# EAGLE board SDMAC (EAGLE 9.6.2)
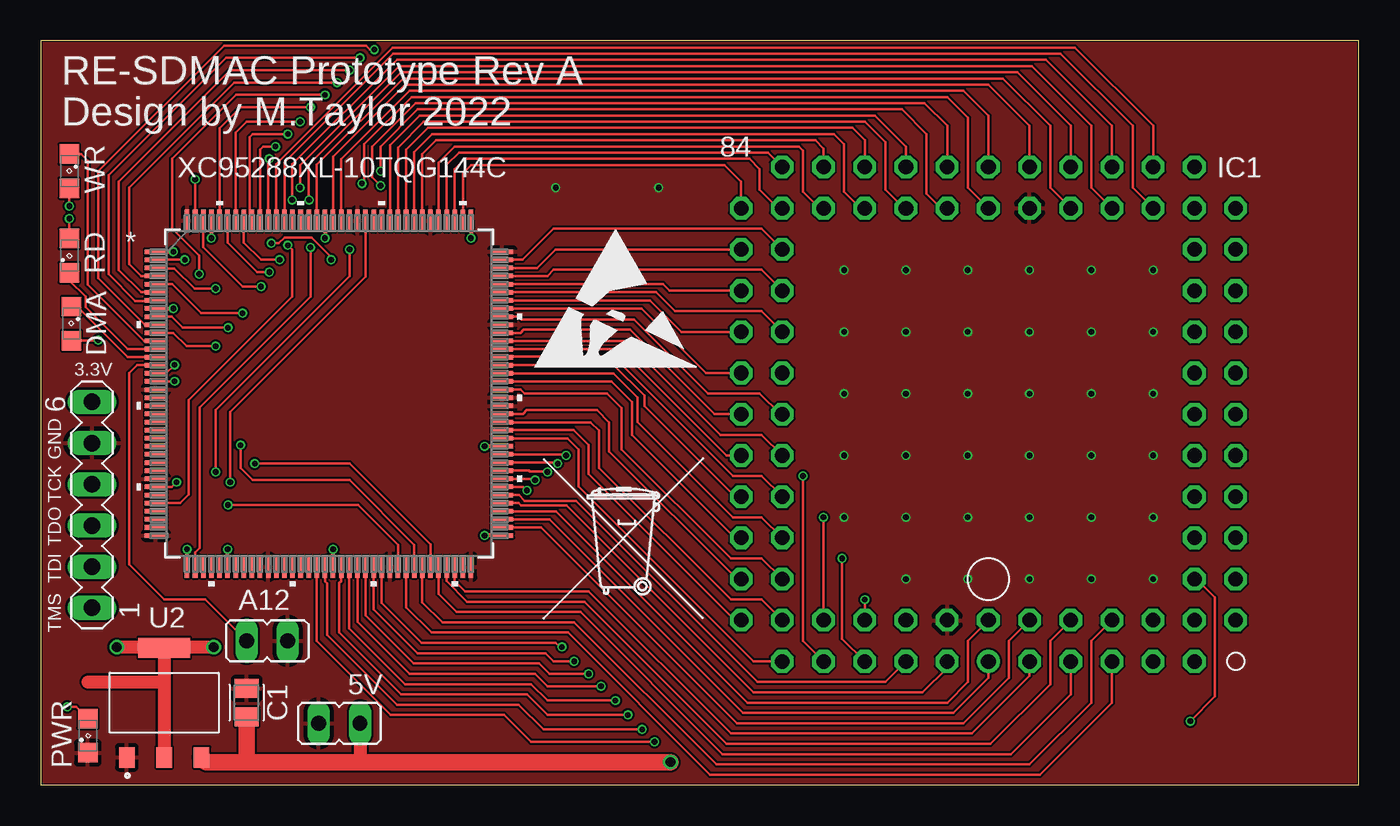
[diagram p0: board, top side]
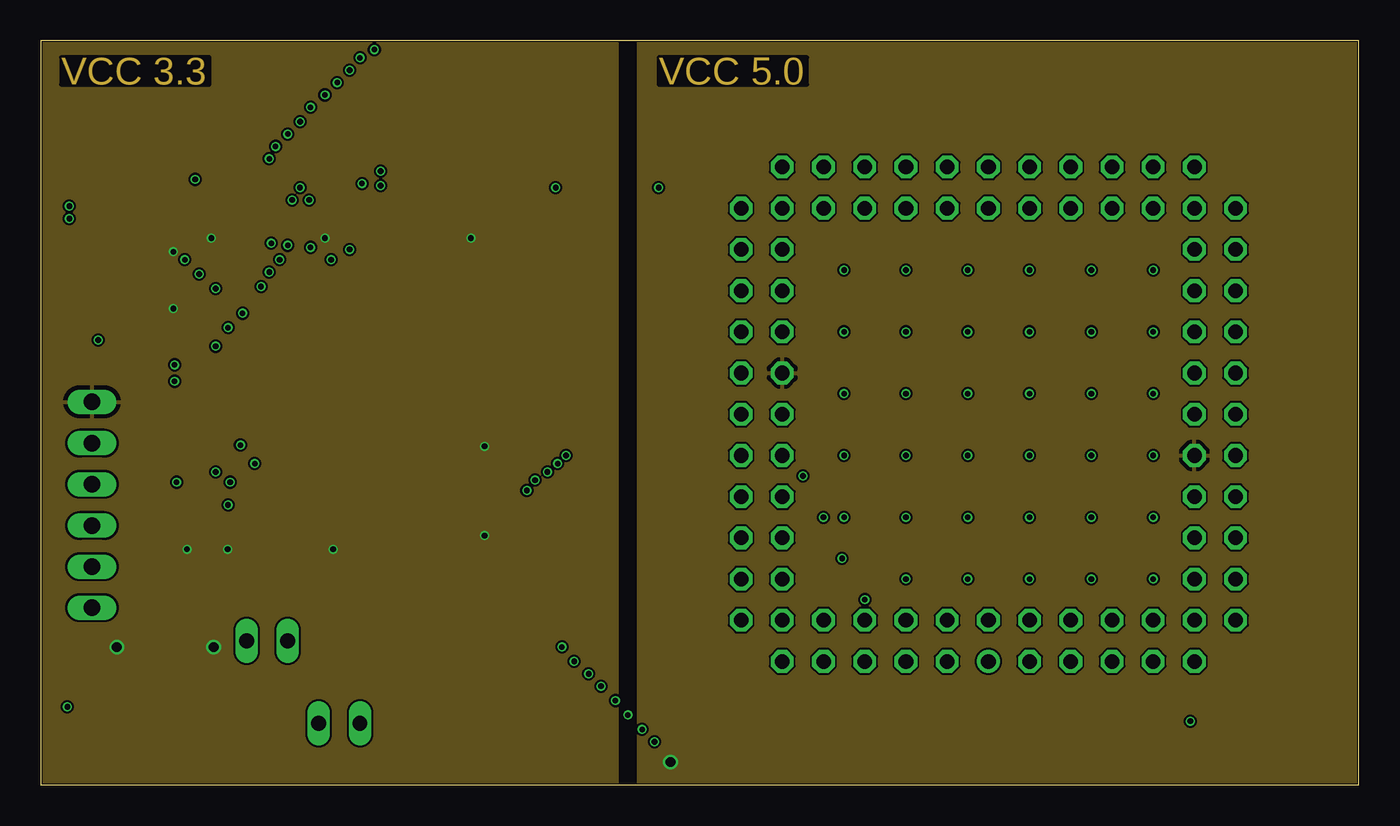
[diagram p1: board, inner layer VCC]
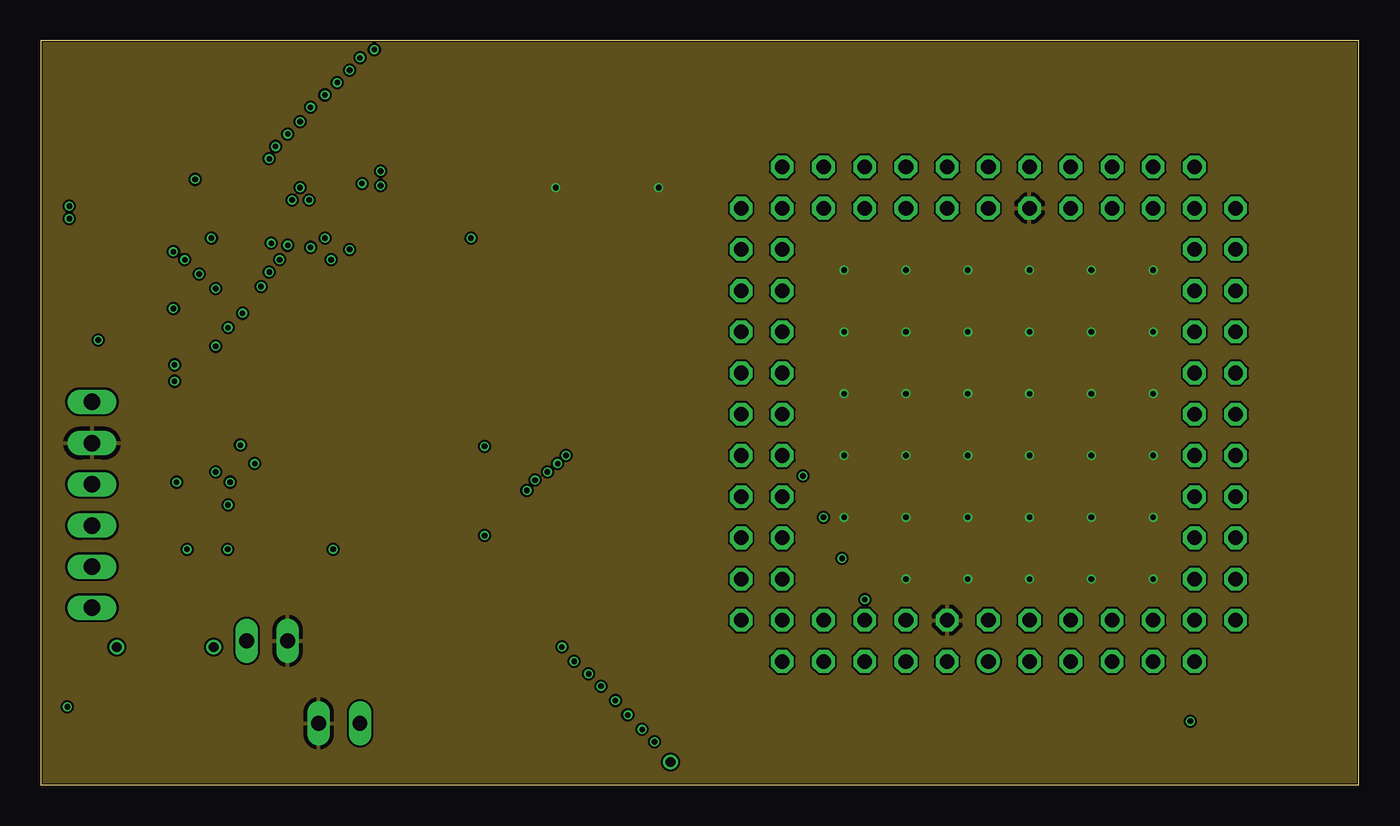
[diagram p2: board, inner layer GND]
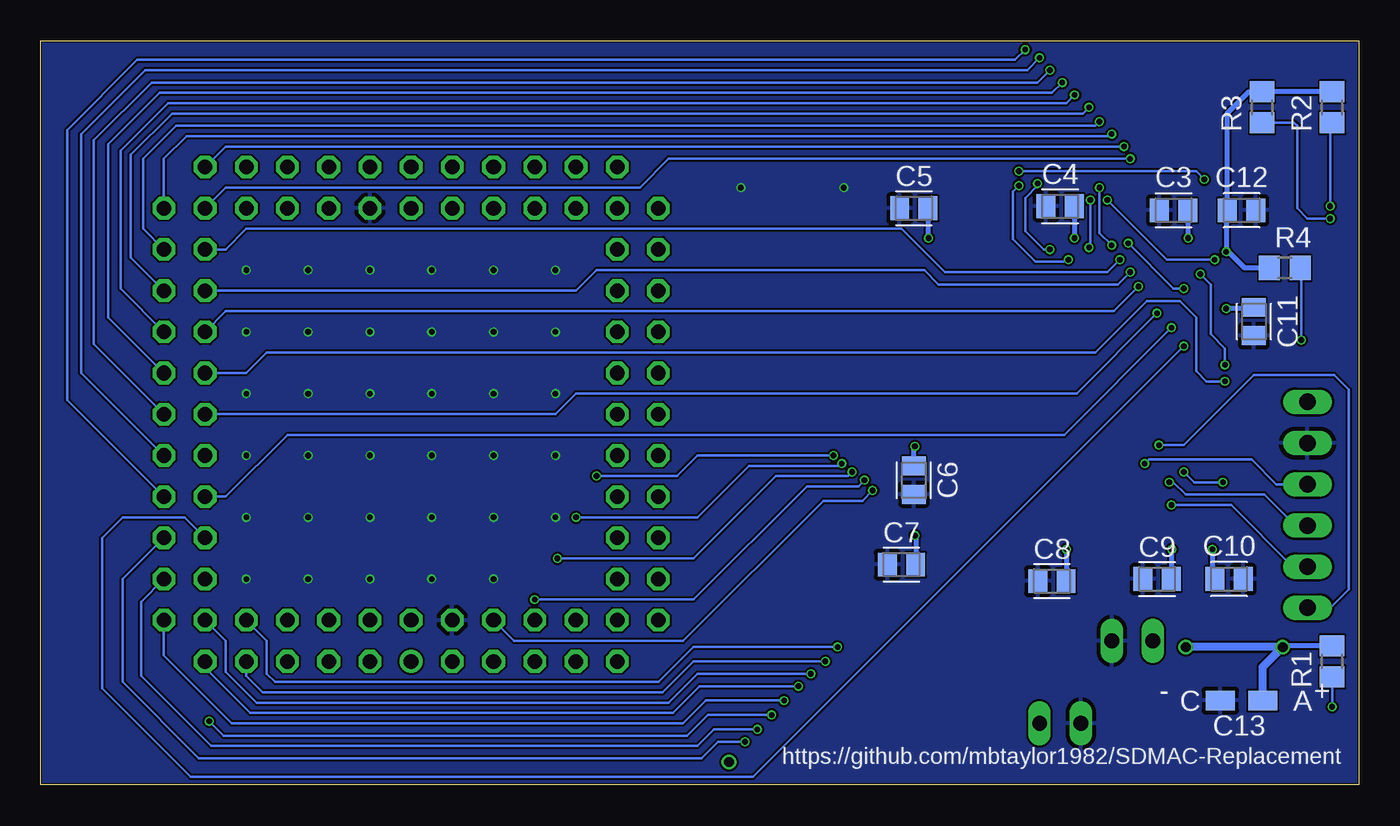
[diagram p3: board, bottom side, seen from below]

Size 81.26 x 45.9 mm. Coordinates in mm from the lower left corner, seen from the top.
Outline: 0,0 81.26,0 81.26,45.9 0,45.9 0,0
Copper layers (1*2*15*16): Top 0.035559375mm / dielectric 0.17018125mm / VCC 0.01778125mm / dielectric 47mil / GND 0.01778125mm / dielectric 0.17018125mm / Bottom 0.035559375mm
Design rules "jlcpcb-4-layer": minimum track width 5mil, minimum drill 0.2mm, track to track 0.126490625mm, track to pad 0.126490625mm, pad to pad 0.126490625mm, via to via 0.126490625mm, smd to smd 0mil, copper to edge 0.1mm, drill to drill 5mil, minimum pad ring 4mil, minimum via ring 4mil, stop-mask expansion 3mil, vias tented up to drill 100mil, thermal gap 10mil

## Footprints (pad centres in the part's own frame; a part is rotated, then mirrored left to right if it is on the bottom)
JP1 = drill 0.914 long: 1 0,-1.27; 2 0,1.27
CAPC2012X110 = smd 1.165 x 1.465: 1 -0.875,0; 2 0.875,0
A = smd 1.8 x 1.23: A 1.31,0; C -1.31,0
SML0805 = smd 1.2 x 1.2: A 1.05,0; C -1.05,0
PLCC84_T = drill 0.9 pad 1.4: 1 0,15.24 | drill 0.9 pad 1.4 octagon: 2 0,12.7; 3 -2.54,15.24; 4 -2.54,12.7; 5 -5.08,15.24; 6 -5.08,12.7; 7 -7.62,15.24; 8 -7.62,12.7; 9 -10.16,15.24; 10 -10.16,12.7; 11 -12.7,15.24; 12 -15.24,12.7; 13 -12.7,12.7; 14 -15.24,10.16; 15 -12.7,10.16; 16 -15.24,7.62; 17 -12.7,7.62; 18 -15.24,5.08; 19 -12.7,5.08; 20 -15.24,2.54; 21 -12.7,2.54; 22 -15.24,0; 23 -12.7,0; 24 -15.24,-2.54; 25 -12.7,-2.54; 26 -15.24,-5.08; 27 -12.7,-5.08; 28 -15.24,-7.62; 29 -12.7,-7.62; 30 -15.24,-10.16; 31 -12.7,-10.16; 32 -15.24,-12.7; 33 -12.7,-15.24; 34 -12.7,-12.7; 35 -10.16,-15.24; 36 -10.16,-12.7; 37 -7.62,-15.24; 38 -7.62,-12.7; 39 -5.08,-15.24; 40 -5.08,-12.7; 41 -2.54,-15.24; 42 -2.54,-12.7; 43 0,-15.24; 44 0,-12.7; 45 2.54,-15.24; 46 2.54,-12.7; 47 5.08,-15.24; 48 5.08,-12.7; 49 7.62,-15.24; 50 7.62,-12.7; 51 10.16,-15.24; 52 10.16,-12.7; 53 12.7,-15.24; 54 15.24,-12.7; 55 12.7,-12.7; 56 15.24,-10.16; 57 12.7,-10.16; 58 15.24,-7.62; 59 12.7,-7.62; 60 15.24,-5.08; 61 12.7,-5.08; 62 15.24,-2.54; 63 12.7,-2.54; 64 15.24,0; 65 12.7,0; 66 15.24,2.54; 67 12.7,2.54; 68 15.24,5.08; 69 12.7,5.08; 70 15.24,7.62; 71 12.7,7.62; 72 15.24,10.16; 73 12.7,10.16; 74 15.24,12.7; 75 12.7,15.24; 76 12.7,12.7; 77 10.16,15.24; 78 10.16,12.7; 79 7.62,15.24; 80 7.62,12.7; 81 5.08,15.24; 82 5.08,12.7; 83 2.54,15.24; 84 2.54,12.7
R0805 = smd 1.3 x 1.5: 1 -0.95,0; 2 0.95,0
MA06-1 = drill 1.016 long: 1 -6.35,0; 2 -3.81,0; 3 -1.27,0; 4 1.27,0; 5 3.81,0; 6 6.35,0
144-TQFP_XIL = smd 1.359 x 0.279: 1 -10.674,8.75; 2 -10.674,8.25; 3 -10.674,7.75; 4 -10.674,7.25; 5 -10.674,6.75; 6 -10.674,6.25; 7 -10.674,5.75; 8 -10.674,5.25; 9 -10.674,4.75; 10 -10.674,4.25; 11 -10.674,3.75; 12 -10.674,3.25; 13 -10.674,2.75; 14 -10.674,2.25; 15 -10.674,1.75; 16 -10.674,1.25; 17 -10.674,0.75; 18 -10.674,0.25; 19 -10.674,-0.25; 20 -10.674,-0.75; 21 -10.674,-1.25; 22 -10.674,-1.75; 23 -10.674,-2.25; 24 -10.674,-2.75; 25 -10.674,-3.25; 26 -10.674,-3.75; 27 -10.674,-4.25; 28 -10.674,-4.75; 29 -10.674,-5.25; 30 -10.674,-5.75; 31 -10.674,-6.25; 32 -10.674,-6.75; 33 -10.674,-7.25; 34 -10.674,-7.75; 35 -10.674,-8.25; 36 -10.674,-8.75; 73 10.674,-8.75; 74 10.674,-8.25; 75 10.674,-7.75; 76 10.674,-7.25; 77 10.674,-6.75; 78 10.674,-6.25; 79 10.674,-5.75; 80 10.674,-5.25; 81 10.674,-4.75; 82 10.674,-4.25; 83 10.674,-3.75; 84 10.674,-3.25; 85 10.674,-2.75; 86 10.674,-2.25; 87 10.674,-1.75; 88 10.674,-1.25; 89 10.674,-0.75; 90 10.674,-0.25; 91 10.674,0.25; 92 10.674,0.75; 93 10.674,1.25; 94 10.674,1.75; 95 10.674,2.25; 96 10.674,2.75; 97 10.674,3.25; 98 10.674,3.75; 99 10.674,4.25; 100 10.674,4.75; 101 10.674,5.25; 102 10.674,5.75; 103 10.674,6.25; 104 10.674,6.75; 105 10.674,7.25; 106 10.674,7.75; 107 10.674,8.25; 108 10.674,8.75 | smd 0.279 x 1.359: 37 -8.75,-10.674; 38 -8.25,-10.674; 39 -7.75,-10.674; 40 -7.25,-10.674; 41 -6.75,-10.674; 42 -6.25,-10.674; 43 -5.75,-10.674; 44 -5.25,-10.674; 45 -4.75,-10.674; 46 -4.25,-10.674; 47 -3.75,-10.674; 48 -3.25,-10.674; 49 -2.75,-10.674; 50 -2.25,-10.674; 51 -1.75,-10.674; 52 -1.25,-10.674; 53 -0.75,-10.674; 54 -0.25,-10.674; 55 0.25,-10.674; 56 0.75,-10.674; 57 1.25,-10.674; 58 1.75,-10.674; 59 2.25,-10.674; 60 2.75,-10.674; 61 3.25,-10.674; 62 3.75,-10.674; 63 4.25,-10.674; 64 4.75,-10.674; 65 5.25,-10.674; 66 5.75,-10.674; 67 6.25,-10.674; 68 6.75,-10.674; 69 7.25,-10.674; 70 7.75,-10.674; 71 8.25,-10.674; 72 8.75,-10.674; 109 8.75,10.674; 110 8.25,10.674; 111 7.75,10.674; 112 7.25,10.674; 113 6.75,10.674; 114 6.25,10.674; 115 5.75,10.674; 116 5.25,10.674; 117 4.75,10.674; 118 4.25,10.674; 119 3.75,10.674; 120 3.25,10.674; 121 2.75,10.674; 122 2.25,10.674; 123 1.75,10.674; 124 1.25,10.674; 125 0.75,10.674; 126 0.25,10.674; 127 -0.25,10.674; 128 -0.75,10.674; 129 -1.25,10.674; 130 -1.75,10.674; 131 -2.25,10.674; 132 -2.75,10.674; 133 -3.25,10.674; 134 -3.75,10.674; 135 -4.25,10.674; 136 -4.75,10.674; 137 -5.25,10.674; 138 -5.75,10.674; 139 -6.25,10.674; 140 -6.75,10.674; 141 -7.25,10.674; 142 -7.75,10.674; 143 -8.25,10.674; 144 -8.75,10.674
SOT-223 = smd 1.26 x 0.96: 1 -3.375,2.3; 2 -3.375,0; 3 -3.375,-2.3 | smd 1.26 x 3.19: 4 3.375,0

## Placement (x,y rotation side)
5V  [JP1]  18.42,3.81 270 top
A12  [JP1]  13.97,8.89 90 top
C1  10uF  [CAPC2012X110]  12.7,5.08 90 top
C3  0.1uF  [CAPC2012X110]  11.43,35.43 180 bottom
C4  0.1uF  [CAPC2012X110]  18.42,35.69 180 bottom
C5  0.1uF  [CAPC2012X110]  27.43,35.56 180 bottom
C6  0.1uF  [CAPC2012X110]  27.43,18.8 270 bottom
C7  0.1uF  [CAPC2012X110]  28.19,13.59 180 bottom
C8  0.1uF  [CAPC2012X110]  18.92,12.57 180 bottom
C9  0.1uF  [CAPC2012X110]  12.45,12.7 180 bottom
C10  0.1uF  [CAPC2012X110]  8,12.7 0 bottom
C11  0.1uF  [CAPC2012X110]  6.48,28.57 270 bottom
C12  0.1uF  [CAPC2012X110]  7.24,35.43 0 bottom
C13  10uF  [A]  7.24,5.21 0 bottom
DMA  [SML0805]  1.9,28.45 270 top
IC1  SUPER_DMAC_THT  [PLCC84_T]  58.42,22.86 180 top
PWR  [SML0805]  2.92,3.05 90 top
R1  430  [R0805]  1.65,7.62 270 bottom
R2  430  [R0805]  1.65,41.78 270 bottom
R3  430  [R0805]  5.97,41.78 270 bottom
R4  430  [R0805]  4.57,31.88 0 bottom
RD  [SML0805]  1.78,32.64 90 top
SV1  [MA06-1]  3.18,17.27 90 top
U1  XC95288XL-10TQG144C  [144-TQFP_XIL]  17.78,24.13 0 top
U2  NCP1117ST33T3G  [SOT-223]  7.62,5.08 90 top
U$1  [ESD_10.00]  30.35,25.65 0 top
U$2  [TONNE_10.00]  35.81,13.21 0 top
WR  [SML0805]  1.78,37.85 270 top

## Library data of the parts
5V A12 = jumper
C1 C3-C12 = Capacitor; CATEGORY: Capacitor
C13 = Volks73-Kemet; CAPACITANCE: 10µF; CATEGORY: Capacitors; DESCRIPTION: CAP TANT 10UF 10V 10% 1206; DOCUMENTATION_LINK: <a href="http://www.kemet.com/Lists/ProductCatalog/Attachments/254/KEM_T2005_T491.pdf">Datasheet</a>; DOCUMENTATION_URL: http://www.kemet.com/Lists/ProductCatalog/Attachments/254/KEM_T2005_T491.pdf; ESR: 3.8 Ohm; FAMILY: Tantalum Capacitors; FEATURES: General Purpose; HEIGHT: 0.071" (1.80mm); LEAD_SPACING: -; LIFETIME_AT_TEMP: 2000 Hrs @ 85°C; MANUFACTURER: Kemet; MANUFACTURER_SIZE_CODE: A; MOUNTING_TYPE: Surface Mount; OPERATING_TEMPERATURE: -55°C ~ 125°C; PACKAGE: 1206 (3216 Metric); PART_NUMBER: T491A106K010AT; SERIES: T491; SIZE: 0.126" L x 0.063" W (3.20mm x 1.60mm); SUPPLIER_ITEM_LINK: <a href="http://www.digikey.com/product-detail/en/T491A106K010AT/399-3684-1-ND/819009">Details</a>; SUPPLIER_ITEM_NUMBER: 399-3684-1-ND; SUPPLIER_ITEM_URL: http://www.digikey.com/product-detail/en/T491A106K010AT/399-3684-1-ND/819009; SUPPLIER_LINK: <a href="http://www.digikey.com">Home Page</a>; SUPPLIER_NAME: Digi-Key; SUPPLIER_URL: http://www.digikey.com; TOLERANCE: ±10%; TYPE: Molded; VOLTAGE-RATED: 10V
DMA PWR RD WR = led
IC1 = Amiga
R1-R4 = rcl; SPICEPREFIX: R
SV1 = con-lstb; OC_FARNELL: unknown; OC_NEWARK: unknown; SPICEPREFIX: X
U1 = XilinxXC95288; COPYRIGHT: Copyright (C) 2022 Ultra Librarian. All rights reserved.; MANUFACTURER_PART_NUMBER: XC95288XL-10TQG144C; MFR_NAME: Xilinx Inc
U2 = IC; CREATED_BY: PCBLayout.com; DIGIKEY_PART_NUMBER: NCP1117ST33T3GOSTR-ND; MANUFACTURER: ON Semiconductor; MPN: NCP1117ST33T3G; PACKAGE: SOT-223
U$1 U$2 = logo

## Nets
!AS: IC1.38 U1.32
!BERR: IC1.47 U1.119
!BG: IC1.82 U1.79
!BGACK: IC1.83 U1.77
!BR: IC1.81 U1.78
!CS: IC1.45 U1.3
!CSS: IC1.67 U1.97
!CSX0: IC1.70 U1.92
!CSX1: IC1.71 U1.93
!DACK: IC1.66 U1.96
!DMAEN: IC1.75 U1.85
!DREQ: IC1.65 U1.100
!DS: IC1.39 U1.38
!DSACK0: IC1.41 U1.126
!DSACK1: IC1.40 U1.128
!INT2: IC1.35 U1.133
!IOR: IC1.69 U1.95
!IORDY: IC1.72 U1.88
!IOW: IC1.68 U1.94
!RST: IC1.46 U1.143
!STERM: IC1.43 U1.125
A12: A12.2 U1.15
CLK: IC1.44 U1.30
CPU_ADDR2: IC1.76 U1.87
CPU_ADDR3: IC1.77 U1.83
CPU_ADDR4: IC1.78 U1.82
CPU_ADDR5: IC1.79 U1.81
CPU_ADDR6: IC1.80 U1.80
CPU_DATAD0: IC1.1 U1.75
CPU_DATAD1: IC1.2 U1.76
CPU_DATAD2: IC1.3 U1.70
CPU_DATAD3: IC1.4 U1.74
CPU_DATAD4: IC1.5 U1.68
CPU_DATAD5: IC1.6 U1.69
CPU_DATAD6: IC1.7 U1.64
CPU_DATAD7: IC1.8 U1.66
CPU_DATAD8: IC1.9 U1.60
CPU_DATAD9: IC1.10 U1.61
CPU_DATAD10: IC1.11 U1.58
CPU_DATAD11: IC1.12 U1.57
CPU_DATAD12: IC1.13 U1.59
CPU_DATAD13: IC1.14 U1.54
CPU_DATAD14: IC1.15 U1.56
CPU_DATAD15: IC1.16 U1.53
CPU_DATAD16: IC1.17 U1.11
CPU_DATAD17: IC1.18 U1.10
CPU_DATAD18: IC1.19 U1.9
CPU_DATAD19: IC1.20 U1.7
CPU_DATAD20: IC1.22 U1.6
CPU_DATAD21: IC1.23 U1.5
CPU_DATAD22: IC1.24 U1.4
CPU_DATAD23: IC1.25 U1.17
CPU_DATAD24: IC1.26 U1.16
CPU_DATAD25: IC1.27 U1.142
CPU_DATAD26: IC1.28 U1.140
CPU_DATAD27: IC1.29 U1.139
CPU_DATAD28: IC1.30 U1.138
CPU_DATAD29: IC1.31 U1.137
CPU_DATAD30: IC1.32 U1.136
CPU_DATAD31: IC1.33 U1.135
DMA_LED: DMA.C U1.14
GND: 5V.1 A12.1 C1.2 C3.2 C4.2 C5.2 C6.2 C7.2 C8.2 C9.2 C10.2 C11.2 C12.2 C13.C IC1.42 IC1.84 PWR.C SV1.5 U1.18 U1.29 U1.36 U1.47 U1.62 U1.72 U1.89 U1.90 U1.99 U1.108 U1.114 U1.123 U1.144 U2.1
INC_ADD: IC1.74 U1.86
INTA: IC1.73 U1.91
INTB: IC1.34 U1.134
N$1: PWR.A R1.2
N$2: R2.2 WR.A
N$3: R3.2 RD.A
N$4: DMA.A R4.2
P_DATA0: IC1.48 U1.118
P_DATA1: IC1.49 U1.117
P_DATA2: IC1.50 U1.116
P_DATA3: IC1.51 U1.115
P_DATA4: IC1.52 U1.113
P_DATA5: IC1.53 U1.112
P_DATA6: IC1.54 U1.110
P_DATA7: IC1.55 U1.111
P_DATA8: IC1.56 U1.106
P_DATA9: IC1.57 U1.107
P_DATA10: IC1.58 U1.104
P_DATA11: IC1.59 U1.105
P_DATA12: IC1.60 U1.102
P_DATA13: IC1.61 U1.103
P_DATA14: IC1.62 U1.101
P_DATA15: IC1.64 U1.98
R!W: IC1.37 U1.2
RD_LED: RD.C U1.13
SIZ1: IC1.36 U1.132
TCK: SV1.4 U1.67
TDI: SV1.2 U1.63
TDO: SV1.3 U1.122
TMS: SV1.1 U1.65
VCC3.3: C3.1 C4.1 C5.1 C6.1 C7.1 C8.1 C9.1 C10.1 C11.1 C12.1 C13.A R1.1 R2.1 R3.1 R4.1 SV1.6 U1.1 U1.8 U1.37 U1.42 U1.55 U1.73 U1.84 U1.109 U1.127 U1.141 U2.2 U2.4
VCC5: 5V.2 C1.1 IC1.21 IC1.63 U2.3
WR_LED: U1.12 WR.C

## Tracks (layer width: path | path; a pad name or v marks a point on that pad's centre or on a via)
!AS  (via drill 0.35)
  Top 0.152: IC1.38 64.77,36.83 64.77,40.64 61.09,44.32 22.08,44.32 15.99,38.23 v15.99,36.83 | v15.24,33.27 15.49,33.02 15.49,30.1 9.14,23.75 9.14,17.91 8.62,17.38 U1.32
  Bottom 0.152: v15.99,36.83 15.99,34.02 v15.24,33.27
!BERR
  Top 0.152: U1.119 21.53,39.44 23.37,41.28 51.44,41.28 53.34,39.37 IC1.47
!BG  (via drill 0.35)
  Top 0.152: U1.79 29.75,18.38 v29.97,18.16
  Bottom 0.152: IC1.82 52.07,8.89 41.66,8.89 33.02,17.53 30.61,17.53 v29.97,18.16
!BGACK
  Top 0.152: IC1.83 55.88,7.24 54.36,5.71 43.94,5.71 32.41,17.25 29.62,17.25 29.46,17.4 28.47,17.4 U1.77
!BR
  Top 0.152: IC1.81 52.07,6.35 44.2,6.35 33.02,17.53 29.85,17.53 29.49,17.88 U1.78
!CS  (via drill 0.35)
  Top 0.152: IC1.45 55.88,40.64 54.48,42.04 23.11,42.04 20.45,39.37 20.45,37.47 v20.96,36.96 | U1.3 7.14,31.85 8.25,31.85 9.49,30.61 v10.79,30.61 | v17.91,32.39 17.91,32.56 16.71,33.75 15.04,33.75 14.69,33.4 v14.22,33.4
  Bottom 0.152: v10.79,30.61 11.43,30.61 v14.22,33.4 | v17.91,32.39 18.03,32.26 19.94,32.26 21.34,33.66 21.34,36.58 v20.96,36.96
!CSS
  Top 0.152: IC1.67 44.45,21.59 41.91,21.59 36.12,27.38 U1.97
!CSX0
  Top 0.152: IC1.70 42.8,15.24 36.45,21.59 36.45,23.62 35.18,24.89 28.47,24.89 U1.92
!CSX1
  Top 0.152: U1.93 35.33,25.38 36.8,23.9 36.8,22.38 42.67,16.51 44.45,16.51 IC1.71
!DACK
  Top 0.152: U1.96 35.73,26.88 42.29,20.32 IC1.66
!DMAEN
  Top 0.152: IC1.75 43.94,7.62 33.15,18.41 33.15,20.7 32.47,21.38 U1.85
!DREQ
  Top 0.152: IC1.65 45.59,22.86 44.32,24.13 41.15,24.13 36.58,28.7 29.65,28.7 29.47,28.88 U1.100
!DS  (via drill 0.35)
  Top 0.152: IC1.39 63.5,40.64 60.2,43.94 22.22,43.94 16.53,38.25 16.53,36.09 v16.55,36.07 | v16.64,33.15 16.64,30.11 9.81,23.28 9.81,14.62 9.53,14.35 U1.38
  Bottom 0.152: v16.55,36.07 16.55,33.23 v16.64,33.15
!DSACK0
  Top 0.152: IC1.41 60.96,40.64 58.42,43.18 22.48,43.18 18.03,38.73 U1.126
!DSACK1
  Top 0.152: IC1.40 62.23,36.83 62.23,40.64 59.31,43.56 22.35,43.56 17.03,38.24 U1.128
!INT2
  Top 0.152: IC1.35 68.58,40.64 63.75,45.47 21.7,45.47 14.53,38.29 U1.133
!IOR
  Top 0.152: IC1.69 44.45,19.05 42.67,19.05 35.31,26.42 28.49,26.42 U1.95
!IORDY
  Top 0.152: IC1.72 42.93,12.7 35.05,20.57 35.05,22.35 34.29,23.11 29.96,23.11 29.72,22.88 U1.88
!IOW
  Top 0.152: IC1.68 42.8,17.78 37.21,23.37 37.21,24 35.31,25.91 28.48,25.91 U1.94
!RST  (via drill 0.35)
  Top 0.152: IC1.46 55.5,35.56 54.61,36.45 54.61,40.13 53.09,41.66 23.24,41.66 20.96,39.37 v20.96,37.85 | v9.52,37.34 U1.143
  Bottom 0.152: v20.96,37.85 10.03,37.85 v9.52,37.34
!STERM
  Top 0.152: IC1.43 58.42,41.28 56.9,42.8 22.73,42.8 18.53,38.6 U1.125
A12
  Top 0.152: A12.2 10.16,11.43 7.62,11.43 5.46,13.59 5.46,25.4 5.97,25.91 7.08,25.91 U1.15
CLK  (via drill 0.35)
  Top 0.152: IC1.44 57.15,36.83 57.15,41.15 55.88,42.42 22.86,42.42 19.94,39.5 19.94,37.21 v19.81,37.08 | v19.05,33.02 19.05,31.38 10.79,23.13 v10.79,19.3 | v8.38,18.67 8.09,18.38 U1.30
  Bottom 0.152: v19.81,37.08 19.81,36.96 20.57,36.2 20.57,34.16 19.43,33.02 v19.05,33.02 | v10.79,19.3 10.16,18.67 v8.38,18.67
CPU_ADDR2
  Top 0.152: IC1.76 44.45,11.43 42.55,11.43 34.42,19.56 34.42,21.84 33.91,22.35 28.48,22.35 U1.87
CPU_ADDR3  (via drill 0.35)
  Top 0.152: U1.83 32.33,20.38 v32.39,20.32 | v46.99,19.05 46.99,8.89 IC1.77
  Bottom 0.152: v32.39,20.32 40.77,20.32 42.04,19.05 v46.99,19.05
CPU_ADDR4  (via drill 0.35)
  Top 0.152: U1.82 31.81,19.88 v31.88,19.81 | v48.26,16.51 IC1.78
  Bottom 0.152: v31.88,19.81 32,19.68 37.59,19.68 40.77,16.51 v48.26,16.51
CPU_ADDR5  (via drill 0.35)
  Top 0.152: U1.81 30.11,19.38 30.15,19.33 31.21,19.33 v31.24,19.3 | v49.4,13.97 49.4,9.02 IC1.79
  Bottom 0.152: v31.24,19.3 31.5,19.05 35.94,19.05 41.02,13.97 v49.4,13.97
CPU_ADDR6  (via drill 0.35)
  Top 0.152: U1.80 30.4,18.88 v30.48,18.8 | v50.8,11.43 IC1.80
  Bottom 0.152: v30.48,18.8 30.86,18.41 34.04,18.41 41.02,11.43 v50.8,11.43
CPU_DATAD0
  Top 0.152: IC1.1 58.42,6.6 56.26,4.45 43.31,4.45 31.37,16.38 U1.75
CPU_DATAD1
  Top 0.152: IC1.2 57.15,8.89 57.15,6.35 55.88,5.08 43.56,5.08 31.76,16.88 U1.76
CPU_DATAD2
  Top 0.152: IC1.3 60.96,6.73 57.4,3.18 42.55,3.18 33.78,11.94 26.16,11.94 25.53,12.57 U1.70
CPU_DATAD3
  Top 0.152: IC1.4 59.69,8.89 59.69,6.6 56.9,3.81 42.93,3.81 30.86,15.88 U1.74
CPU_DATAD4
  Top 0.152: IC1.5 63.5,5.59 59.82,1.91 42.04,1.91 33.27,10.67 25.65,10.67 24.53,11.79 U1.68
CPU_DATAD5
  Top 0.152: IC1.6 62.23,8.89 62.23,6.22 58.55,2.54 42.29,2.54 33.53,11.3 26.29,11.3 25.02,12.57 25.02,13.45 U1.69
CPU_DATAD6
  Top 0.152: IC1.7 66.04,5.08 61.59,0.64 41.28,0.64 32.51,9.4 24.09,9.4 22.53,10.96 U1.64
CPU_DATAD7
  Top 0.152: IC1.8 64.77,8.89 64.77,5.08 60.96,1.27 41.66,1.27 32.89,10.03 24.76,10.03 23.52,11.27 23.52,12.26 23.53,12.27 U1.66
CPU_DATAD8  (via drill 0.35)
  Top 0.152: U1.60 20.53,10.84 23.24,8.13 31.11,8.13 31.62,7.62 v32.89,7.62
  Bottom 0.152: IC1.9 68.58,6.73 67.56,5.71 42.93,5.71 41.02,7.62 v32.89,7.62
CPU_DATAD9  (via drill 0.35)
  Top 0.152: U1.61 21.03,11.23 23.5,8.76 31.75,8.76 32,8.51 v32.13,8.51
  Bottom 0.152: v32.13,8.51 41.02,8.51 43.18,6.35 66.8,6.35 67.31,6.86 67.31,8.89 IC1.10
CPU_DATAD10  (via drill 0.35)
  Top 0.152: U1.58 19.53,10.06 22.73,6.86 30.48,6.86 31.24,6.1 v34.54,6.1
  Bottom 0.152: v34.54,6.1 40.64,6.1 42.29,4.45 68.33,4.45 71.12,7.24 IC1.11
CPU_DATAD11  (via drill 0.35)
  Top 0.152: v35.43,5.21 31.24,5.21 30.23,6.22 22.48,6.22 19.03,9.67 U1.57
  Bottom 0.152: IC1.12 73.66,8 69.47,3.81 41.66,3.81 40.26,5.21 v35.43,5.21
CPU_DATAD12  (via drill 0.35)
  Top 0.152: U1.59 20.03,10.45 22.99,7.49 30.73,7.49 31.37,6.86 v33.78,6.86
  Bottom 0.152: v33.78,6.86 40.77,6.86 42.55,5.08 67.95,5.08 69.85,6.98 69.85,8.89 IC1.13
CPU_DATAD13  (via drill 0.35)
  Top 0.152: U1.54 17.53,12.57 17.66,12.44 17.66,10.04 17.65,10.03 17.65,9.27 21.97,4.95 29.46,4.95 30.99,3.43 v37.08,3.43
  Bottom 0.152: v37.08,3.43 39.75,3.43 40.77,2.41 70.74,2.41 75.06,6.73 75.06,11.3 IC1.14
CPU_DATAD14  (via drill 0.35)
  Top 0.152: IC1.15 71.25,12.7 72.39,11.56 72.39,5.46 v70.87,3.94 | v36.19,4.32 31.24,4.32 29.97,5.59 22.22,5.59 18.42,9.4 18.42,12.45 18.53,12.57 U1.56
  Bottom 0.152: v36.19,4.32 40.13,4.32 41.4,3.05 69.98,3.05 v70.87,3.94
CPU_DATAD15  (via drill 0.35)
  Top 0.152: v37.85,2.67 30.23,2.67 28.57,4.32 21.59,4.32 17.03,8.88 U1.53
  Bottom 0.152: IC1.16 76.2,12.7 76.2,6.35 71.5,1.65 40.51,1.65 39.5,2.67 v37.85,2.67
CPU_DATAD16  (via drill 0.35)
  Top 0.152: v10.79,27.05 9.02,27.05 8.19,27.88 U1.11
  Bottom 0.152: IC1.17 72.39,16.51 76.2,16.51 77.47,15.24 77.47,5.97 72.01,0.51 37.34,0.51 v10.79,27.05
CPU_DATAD17  (via drill 0.35)
  Top 0.152: v20.57,45.34 20.32,45.34 20.07,45.59 11.3,45.59 3.56,37.85 3.56,31.24 6.42,28.38 U1.10
  Bottom 0.152: IC1.18 79.63,23.75 79.63,40.39 75.31,44.7 21.21,44.7 v20.57,45.34
CPU_DATAD18  (via drill 0.35)
  Top 0.152: U1.9 8.08,28.88 8.76,28.19 v11.56,28.19
  Bottom 0.152: IC1.19 69.85,17.78 66.04,21.59 18.16,21.59 v11.56,28.19
CPU_DATAD19  (via drill 0.35)
  Top 0.152: U1.7 7.07,29.85 5.84,29.85 4.19,31.5 4.19,37.59 11.43,44.83 v19.68,44.83
  Bottom 0.152: IC1.20 78.74,25.4 78.74,40.13 74.8,44.07 20.45,44.07 v19.68,44.83
CPU_DATAD20  (via drill 0.35)
  Top 0.152: v19.05,44.07 11.68,44.07 4.83,37.21 4.83,31.75 6.2,30.38 U1.6
  Bottom 0.152: IC1.22 77.98,27.18 77.98,39.75 74.42,43.31 19.81,43.31 v19.05,44.07
CPU_DATAD21  (via drill 0.35)
  Top 0.152: U1.5 8.11,30.88 9.91,29.08 v12.45,29.08
  Bottom 0.152: IC1.23 49.53,22.86 48.26,24.13 17.4,24.13 v12.45,29.08
CPU_DATAD22  (via drill 0.35)
  Top 0.152: v18.29,43.31 11.94,43.31 5.46,36.83 5.46,32.13 6.21,31.38 U1.4
  Bottom 0.152: IC1.24 77.09,28.83 77.09,39.5 73.91,42.67 18.92,42.67 v18.29,43.31
CPU_DATAD23  (via drill 0.35)
  Top 0.152: U1.17 v8.24,24.88 v8.25,24.89
  Bottom 0.152: IC1.25 68.58,25.4 67.31,26.67 16.26,26.67 13.08,29.85 11.05,29.85 10.03,28.83 10.03,25.53 9.4,24.89 v8.25,24.89
CPU_DATAD24  (via drill 0.35)
  Top 0.152: v9.78,31.5 9.78,32.64 8.13,34.29 8.13,38.61 12.06,42.55 v17.53,42.55 | v8.25,25.91 7.73,25.38 U1.16
  Bottom 0.152: IC1.26 76.33,30.61 76.33,39.12 73.41,42.04 18.03,42.04 v17.53,42.55 | v8.25,25.91 8.25,26.92 9.14,27.81 9.14,30.86 v9.78,31.5
CPU_DATAD25  (via drill 0.35)
  Top 0.152: v13.59,30.73 12.45,30.73 10.03,33.15 U1.142
  Bottom 0.152: IC1.27 69.85,29.21 15.11,29.21 v13.59,30.73
CPU_DATAD26  (via drill 0.35)
  Top 0.152: v16.64,41.78 12.32,41.78 11.03,40.49 U1.140
  Bottom 0.152: IC1.28 75.69,32.51 75.69,38.86 73.15,41.4 17.02,41.4 v16.64,41.78
CPU_DATAD27  (via drill 0.35)
  Top 0.152: v14.1,31.62 13.33,31.62 11.53,33.43 U1.139
  Bottom 0.152: IC1.29 48.26,30.48 46.99,31.75 26.8,31.75 25.91,30.86 14.86,30.86 v14.1,31.62
CPU_DATAD28  (via drill 0.35)
  Top 0.152: v16,40.89 12.7,40.89 12.03,40.22 U1.138
  Bottom 0.152: IC1.30 74.93,34.29 74.93,38.61 72.9,40.64 16.26,40.64 v16,40.89
CPU_DATAD29  (via drill 0.35)
  Top 0.152: v14.73,32.39 13.59,32.39 12.53,33.44 U1.137
  Bottom 0.152: IC1.31 69.85,33.02 68.58,34.29 28.19,34.29 25.53,31.62 15.49,31.62 v14.73,32.39
CPU_DATAD30  (via drill 0.35)
  Top 0.152: U1.136 12.9,34.93 12.9,39.95 13.08,40.13 v15.24,40.13
  Bottom 0.152: IC1.32 73.66,38.61 72.26,40 15.37,40 v15.24,40.13
CPU_DATAD31  (via drill 0.35)
  Top 0.152: U1.135 13.53,39.18 13.72,39.37 v14.48,39.37
  Bottom 0.152: v14.48,39.37 69.85,39.37 IC1.33
DMA_LED
  Top 0.152: U1.14 5.37,26.38 2.25,29.5 DMA.C
GND  (via drill 0.35)
  other vias: 31.75,36.83 38.1,36.83 49.53,31.75 53.34,31.75 57.15,31.75 60.96,31.75 64.77,31.75 68.58,31.75 49.53,27.94 53.34,27.94 57.15,27.94 60.96,27.94 64.77,27.94 68.58,27.94 49.53,24.13 53.34,24.13 57.15,24.13 60.96,24.13 64.77,24.13 68.58,24.13 49.53,20.32 53.34,20.32 57.15,20.32 60.96,20.32 64.77,20.32 68.58,20.32 49.53,16.51 53.34,16.51 57.15,16.51 60.96,16.51 64.77,16.51 68.58,16.51 53.34,12.7 57.15,12.7 60.96,12.7 64.77,12.7 68.58,12.7
  pour GND: 0,45.72 81.28,45.72 81.28,0 0,0
  pour Top: 0,45.72 0,0 81.28,0 81.28,45.72
  pour Bottom: 0,45.72 0,0 81.28,0 81.28,45.72
INC_ADD
  Top 0.152: IC1.74 42.8,10.16 33.78,19.18 33.78,20.96 32.86,21.88 U1.86
INTA
  Top 0.152: U1.91 29.6,24.38 29.85,24.13 34.92,24.13 35.81,23.24 35.81,20.7 42.55,13.97 44.45,13.97 IC1.73
INTB  (via drill 0.35)
  Top 0.152: U1.134 14.03,38.61 v14.1,38.61
  Bottom 0.152: IC1.34 69.85,36.83 44.32,36.83 42.55,38.61 v14.1,38.61
N$1  (via drill 0.35)
  Top 0.152: 2.51,4.5 PWR.A 2.19,4.83 v1.65,4.83
  Bottom 0.152: R1.2 v1.65,4.83
N$2  (via drill 0.35)
  Top 0.152: v1.78,35.69 WR.A
  Bottom 0.152: v1.78,35.69 1.78,40.71 R2.2
N$3  (via drill 0.35)
  Top 0.152: v1.78,34.92 RD.A
  Bottom 0.152: R3.2 4,40.83 3.81,40.64 3.81,35.56 3.18,34.92 v1.78,34.92
N$4  (via drill 0.35)
  Top 0.152: v3.56,27.43 3.52,27.4 DMA.A
  Bottom 0.152: v3.56,27.43 3.56,31 R4.2
P_DATA0
  Top 0.152: IC1.48 53.21,35.56 52.07,36.7 52.07,39.62 50.8,40.89 23.62,40.89 22.03,39.3 U1.118
P_DATA1
  Top 0.152: U1.117 22.53,39.17 23.88,40.51 50.04,40.51 50.8,39.75 IC1.49
P_DATA2
  Top 0.152: U1.116 23.03,39.03 24.13,40.13 48.89,40.13 49.53,39.5 49.53,36.58 50.55,35.56 IC1.50
P_DATA3
  Top 0.152: IC1.51 48.26,39.24 47.75,39.75 24.38,39.75 23.53,38.9 U1.115
P_DATA4
  Top 0.152: IC1.52 48.01,35.56 46.99,36.58 46.99,39.12 46.74,39.37 25.53,39.37 24.53,38.37 U1.113
P_DATA5
  Top 0.152: IC1.53 44.83,38.99 25.78,38.99 25.03,38.24 U1.112
P_DATA6
  Top 0.152: U1.110 26.03,37.71 26.54,38.23 42.16,38.23 43.18,37.21 IC1.54
P_DATA7
  Top 0.152: U1.111 25.53,37.98 26.16,38.61 43.69,38.61 44.32,37.97 44.32,36.7 45.47,35.56 IC1.55
P_DATA8
  Top 0.152: U1.106 30.61,31.88 31.75,33.02 IC1.56
P_DATA9
  Top 0.152: U1.107 29.71,32.38 31.62,34.29 44.45,34.29 IC1.57
P_DATA10
  Top 0.152: U1.104 38.35,30.88 38.75,30.48 IC1.58
P_DATA11
  Top 0.152: U1.105 31.25,31.38 31.63,31.76 44.44,31.76 IC1.59
P_DATA12
  Top 0.152: U1.102 37.56,29.88 39.5,27.94 IC1.60
P_DATA13
  Top 0.152: U1.103 37.95,30.38 39.12,29.21 44.45,29.21 IC1.61
P_DATA14
  Top 0.152: U1.101 37.04,29.38 41.02,25.4 IC1.62
P_DATA15
  Top 0.152: IC1.64 41.53,22.86 36.32,28.07 29.78,28.07 29.6,27.88 U1.98
R!W  (via drill 0.35)
  Top 0.152: IC1.37 66.04,40.64 61.95,44.73 21.97,44.73 15.51,38.27 v15.51,36.07 | U1.2 v8.88,32.38 v8.89,32.39
  Bottom 0.152: v15.51,36.07 11.83,32.39 v8.89,32.39
RD_LED
  Top 0.152: U1.13 5.38,26.88 2.79,29.46 2.79,30.1 1.78,31.11 RD.C
SIZ1
  Top 0.152: IC1.36 67.31,36.83 67.31,40.64 62.87,45.08 21.72,45.08 15.03,38.4 U1.132
TCK  (via drill 0.35)
  Top 0.152: U1.67 24.03,14.83 19.05,19.81 v13.21,19.81
  Bottom 0.152: SV1.4 5.08,18.54 6.6,20.07 12.95,20.07 v13.21,19.81
TDI  (via drill 0.35)
  Top 0.152: U1.63 22.03,14.8 19.56,17.27 v11.56,17.27
  Bottom 0.152: v11.56,17.27 7.87,17.27 4.06,13.46 SV1.2
TDO  (via drill 0.35)
  Top 0.152: U1.122 20.03,31.33 11.68,22.99 v11.68,18.67
  Bottom 0.152: v11.68,18.67 11.43,18.67 10.67,17.91 5.84,17.91 3.94,16 SV1.3
TMS  (via drill 0.35)
  Top 0.152: U1.65 23.03,14.82 19.05,18.8 13.08,18.8 12.32,19.56 v12.32,20.96
  Bottom 0.152: SV1.1 1.78,10.92 0.63,12.07 0.63,24.38 1.52,25.27 6.48,25.27 10.79,20.96 v12.32,20.96
VCC3.3  (via drill 0.35, 0.6)
  Top 0.152: 7.57,8.51 U2.4 7.67,8.51
  Top 0.254: U1.1 v8.19,32.88 | U1.8 v8.19,29.38 | U1.84 v27.37,20.88 | U1.73 v27.37,15.38 | U1.37 v9.03,14.54 | U1.42 v11.53,14.54 | U1.55 v18.03,14.54 | U1.141 v10.53,33.72 | U1.127 v17.53,33.72 | U1.109 v26.53,33.72
  Top 0.813: U2.4 7.62,6.35 | 7.62,6.35 U2.2 | 2.93,6.35 7.62,6.35 | v4.7,8.51 7.57,8.51 | 7.67,8.51 v10.67,8.51
  Bottom 0.152: 10.55,33.75 v10.53,33.72 | v17.54,33.73 v17.53,33.72 | v27.37,20.88 27.43,20.94 | v27.37,15.38 27.32,15.33 | 18.03,12.59 C8.1 | v11.53,14.54 11.57,14.5 | v8.19,32.88 8.19,33.02 | 26.53,35.53 C5.1 | 4.63,8.57 v4.7,8.51
  Bottom 0.305: C6.1 27.43,20.94 | 27.32,15.33 C7.1 | v18.03,14.54 18.03,12.59 | 11.57,14.5 C9.1 | v26.53,33.72 26.53,35.53 | R1.1 4.63,8.57 | 1.14,42.48 1.5,42.58 R2.1 R3.1 | 5.48,43.22 R3.1 | R4.1 7.04,31.88 8.19,33.02 8.19,35.36 C12.1 8.11,41.42 6.8,42.73 R3.1 | C3.1 10.55,33.75 | C4.1 v17.54,33.73 | C11.1 6.55,29.38 v8.19,29.38 | v9.03,14.54 9.03,12.85 C10.1
  Bottom 0.508: C13.A 5.93,7.28 v4.7,8.51 v10.67,8.51
  pour VCC: 0,45.72 35.56,45.72 35.56,0 0,0
VCC5  (via drill 0.6)
  Top 0.813: 5V.2 19.68,1.41
  Top 1.016: v38.83,1.41 19.68,1.41 12.7,1.41 | 12.7,1.41 10.21,1.41 U2.3 | C1.1 12.7,1.41
  pour VCC: 36.83,45.72 36.83,0 81.28,0 81.28,45.72
WR_LED
  Top 0.152: U1.12 6.4,27.38 2.92,30.86 2.92,38.48 2.51,38.9 WR.C

## Text on the board
VCC: VCC 3.3 | VCC 5.0
tNames: RE-SDMAC Prototype Rev A | Design by M.Taylor 2022 | 3.3V | GND | TCK | TDO | TDI | TMS
bNames: https://github.com/mbtaylor1982/SDMAC-Replacement